# Altium PCB 控制盒AB区8按键.PcbDoc
Units mil, origin at the board's own origin, x right, y up, seen from the top; angles counter-clockwise.
Board outline 535.43 x 5142.52 mil, 2 copper layers (Top Layer, Bottom Layer); 1 components, 9 nets, 26 pads, 16 vias.
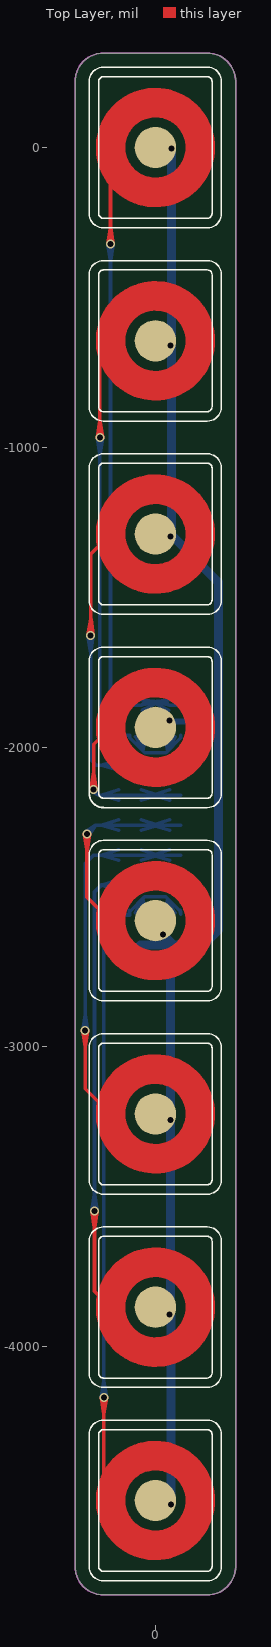
[diagram p0: Top Layer view]
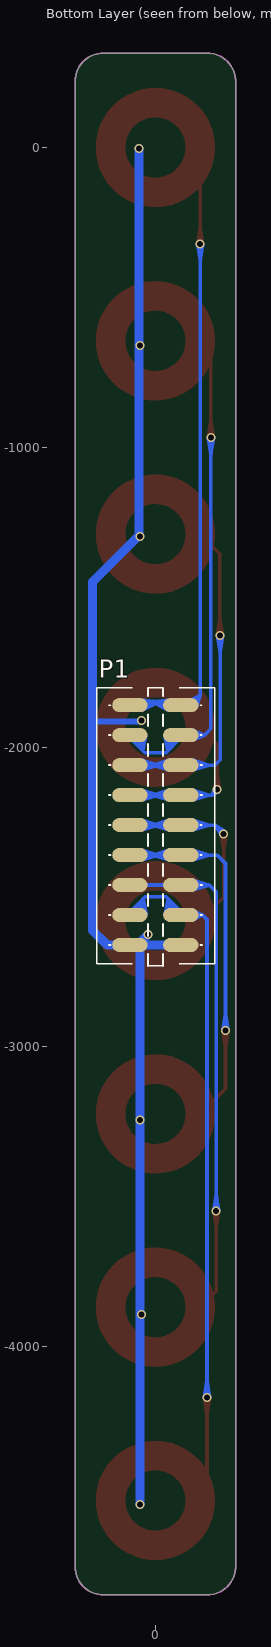
[diagram p1: Bottom Layer view, seen from below]

## Layer stack, top to bottom
Top Solder: solder mask 0.4, Solder Resist, Dk 3.5
Top Layer: signal copper 1.4
Dielectric1: dielectric 12.6, FR-4, Dk 4.8
Bottom Layer: signal copper 1.4
Bottom Solder: solder mask 0.4, Solder Resist, Dk 3.5

## Board outline
-267.72,-4733.18 ccw(c-173.23,-4733.18) -173.23,-4827.67 173.23,-4827.67 ccw(c173.23,-4733.18) 267.72,-4733.18 267.72,220.36 ccw(c173.23,220.36) 173.23,314.85 -173.23,314.85 ccw(c-173.23,220.36) -267.72,220.36

## Design rules (kind name [scope] priority, off if disabled: settings)
Clearance [All] p1: gap=10
PolygonConnect [All] p1: connectstyle=Relief reliefconductorwidth=10 reliefentries=4 polygonreliefangle="90 Angle" airgapwidth=10
RoutingVias [All] p1: holewidth=28 width=50 viastyle="Through Hole" minholewidth=10 minwidth=10 maxholewidth=28 maxwidth=50
SilkToSolderMaskClearance SilkscreenOverComponentPads [IsPad] p1: minsilkscreentomaskgap=10 clearancetoexposedcopper=TRUE
SolderMaskExpansion [All] p1: expansion=4
Width [All] p1: maxlimit=50 minlimit=10 preferedwidth=10
28 further rules are at their usual default settings.

## Components (designator, comment, footprint, x,y, rotation, side; value= is the part's Value field where it differs from the comment)
P1 "Header 9" CON-P9 0,-2260 r180 bottom

## Footprints (in the part's own frame and the unit in brackets; to place one, negate y for a bottom-side part, rotate by r counter-clockwise, add the part's x,y. Pads: shape width x height; smd on the part's side, far side on the other; paste and mask are expansions set on the pad)
CON-P9 [mm]
  oval 3x1.2 smd: 1(-2.159,10.16) 1(2.159,10.16) 2(-2.159,7.62) 2(2.159,7.62) 3(-2.159,5.08) 3(2.159,5.08) 4(-2.159,2.54) 4(2.159,2.54) 5(-2.159,0) 5(2.159,0) 6(-2.159,-2.54) 6(2.159,-2.54) 7(-2.159,-5.08) 7(2.159,-5.08) 8(-2.159,-7.62) 8(2.159,-7.62) 9(-2.159,-10.16) 9(2.159,-10.16)
  silkscreen extent -4.97,-11.94 5.03,11.64

## Part data
P1: "Header, 9-Pin"

## Free pads (board coordinates)
  round 137.8 smd: 1(0,0) 2(0,-644.68) 3(0,-1289.37) 4(0,-1934.06) 5(0,-2578.74) 6(0,-3223.43) 7(0,-3868.11) 8(0,-4512.8)

## Via types
v1: diameter 30, hole 20, Top Layer to Bottom Layer, tented both sides, 15 vias
v2: diameter 30, hole 20, Top Layer to Bottom Layer, tented bottom, 1 vias

## Nets (pads, with @x,y where several pads share a name; then routed paths per layer and width w, separated by ;. In a path a pad name is that pad's centre, name@x,y a point inside that pad or via, vN(x,y) a via of type N, cw(c..) or ccw(c..) an arc to the next point about the centre after c; other vN are vias at no path point)
K1: P1.1 | length 6062.1
  Top Layer w12: v1@-158.55,-321.88 -149.93,-269.7 ; v1@-158.55,-321.85 -149.58,-267.58 v1@-140.61,-321.85 ; v1@-158.55,-321.79 -149.58,-271.58 v1@-140.62,-321.79 ; v1@-158.54,-321.76 -149.23,-269.7 ; -149.58,-2.66 v1(-149.58,-322.58) ; v1@-140.61,-321.88 -149.23,-269.7 ; v1@-140.62,-321.76 -149.93,-269.7 ; -149.93,-269.7 v1(-149.58,-322.58) ; v1(-149.58,-322.58) -149.23,-269.7
  Top Layer w94.49: -149.58,-2.66 cw(c0,0) -149.61,0 cw(c0,0) 149.61,0
  Top Layer w98.43: -149.61,0 ccw(c0,0) -149.58,-2.66 ccw(c0,0) 149.61,0 ; 149.61,0 ccw(c0,0) 149.61,0
  Bottom Layer w12: P1.1@-50.15,-1842.39 11.58,-1849.16 ; P1.1@-49.57,-1860 11.58,-1849.16 ; P1.1@-44.06,-1876.74 11.58,-1849.16 ; P1.1@44.06,-1876.74 -11.58,-1849.16 ; P1.1@49.57,-1860 -11.58,-1849.16 ; P1.1@50.15,-1842.39 -11.58,-1849.16 ; P1.1@85,-1860 46.01,-1860 35.17,-1849.16 -35.17,-1849.16 -46.01,-1860 -85,-1860 -116,-1860 -149.58,-1826.42 ; -149.93,-375.46 -140.62,-323.41 -149.58,-373.58 -158.55,-323.38 -149.23,-375.46 ; -149.93,-375.46 -158.55,-323.29 -149.58,-377.58 -140.61,-323.32 -149.23,-375.46 ; -149.93,-375.46 v1(-149.58,-322.58) ; -149.58,-1826.42 v1(-149.58,-322.58) ; -149.58,-1826.42 P1.1@-135.77,-1868.69 ; -149.58,-1826.42 P1.1@-109.68,-1846.04 ; -149.58,-1826.42 P1.1@-120.43,-1860 ; -149.58,-1826.42 P1.1@-135.77,-1868.69 ; -149.58,-1826.42 P1.1@-109.68,-1846.04 ; -149.58,-1826.42 P1.1@-120.43,-1860 ; -149.58,-1826.42 P1.1@-135.77,-1868.69 ; -149.58,-1826.42 P1.1@-109.68,-1846.04 ; -149.58,-1826.42 P1.1@-120.43,-1860 ; -149.58,-1826.42 P1.1@-135.77,-1868.69 ; -149.58,-1826.42 P1.1@-109.68,-1846.04 ; -149.58,-1826.42 P1.1@-120.43,-1860 ; -149.58,-1826.42 P1.1@-135.77,-1868.69 ; -149.58,-1826.42 P1.1@-109.68,-1846.04 ; -149.58,-1826.42 P1.1@-120.43,-1860 ; v1(-149.58,-322.58) -149.23,-375.46
K2: P1.2 | length 5554.6
  Top Layer w12: v1@-193.97,-967.29 -185.35,-915.12 ; v1@-193.97,-967.26 -185,-913 v1@-176.03,-967.26 ; v1@-193.96,-967.21 -185,-917 v1@-176.04,-967.21 ; v1@-193.96,-967.17 -184.65,-915.12 ; v1@-176.04,-967.17 -185.35,-915.12 ; v1@-176.03,-967.29 -184.65,-915.12 ; -149.61,-644.68 -185,-680.08 v1(-185,-968) ; -185.35,-915.12 v1(-185,-968) ; v1(-185,-968) -184.65,-915.12
  Top Layer w94.49: -149.61,-644.68 ccw(c0,-644.68) 149.61,-644.68 ccw(c0,-644.68) -149.61,-644.68
  Top Layer w98.43: 149.61,-644.68 ccw(c0,-644.68) 149.61,-644.68
  Bottom Layer w12: v1@-193.96,-968.83 -184.65,-1020.88 ; v1@-193.96,-968.79 -185,-1019 v1@-176.04,-968.79 ; v1@-193.97,-968.74 -185,-1023 v1@-176.03,-968.74 ; v1@-193.97,-968.71 -185.35,-1020.88 ; v1@-176.04,-968.83 -185.35,-1020.88 ; v1@-176.03,-968.71 -184.65,-1020.88 ; P1.2@-66.34,-1965.39 -42.09,-2012.03 ; P1.2@-49.57,-1960 -42.09,-2012.03 ; P1.2@-31.95,-1960.45 -42.09,-2012.03 ; P1.2@31.95,-1960.45 42.09,-2012.03 ; P1.2@49.57,-1960 42.09,-2012.03 ; P1.2@66.34,-1965.39 42.09,-2012.03 ; P1.2@85,-1960 85,-1969.12 35.17,-2018.95 -35.17,-2018.95 -85,-1969.12 -85,-1960 -164,-1960 ; -185.35,-1020.88 v1(-185,-968) ; v1(-185,-968) -185,-1939 -164,-1960 ; v1(-185,-968) -184.65,-1020.88 ; -164,-1960 P1.2@-124,-1977.26 ; -164,-1960 P1.2@-124,-1942.74 ; -164,-1960 P1.2@-120.43,-1960 ; -164,-1960 P1.2@-124,-1977.26 ; -164,-1960 P1.2@-124,-1942.74 ; -164,-1960 P1.2@-120.43,-1960 ; -164,-1960 P1.2@-124,-1977.26 ; -164,-1960 P1.2@-124,-1942.74 ; -164,-1960 P1.2@-120.43,-1960 ; -164,-1960 P1.2@-124,-1977.26 ; -164,-1960 P1.2@-124,-1942.74 ; -164,-1960 P1.2@-120.43,-1960 ; -164,-1960 P1.2@-124,-1977.26 ; -164,-1960 P1.2@-124,-1942.74 ; -164,-1960 P1.2@-120.43,-1960
K3: P1.3 | length 8798.4
  Top Layer w12: v1@-224.96,-1626.13 -215.39,-1574.12 ; v1@-224.95,-1626.1 -215,-1571.98 ; v1@-224.95,-1626.01 -214.68,-1574.13 ; v1@-207.02,-1626.38 -215,-1575.97 ; -149.61,-1289.37 -215,-1354.76 -215,-1626 v1(-216,-1627) ; v1(-216,-1627) -215,-1571.98 ; v1(-216,-1627) -215.39,-1574.12 ; v1(-216,-1627) -214.68,-1574.13 ; v1(-216,-1627) -215,-1575.97 ; -215.39,-1574.12 -207.02,-1626.34 -215.07,-1576.01 -224.95,-1626.04 -215,-1575.97 ; -215,-1571.98 -207.02,-1626.43 -214.68,-1574.13
  Top Layer w94.49: -149.61,-1289.37 ccw(c0,-1289.37) 149.61,-1289.37 ; -149.61,-1289.37 cw(c0,-1289.37) 149.61,-1289.37 ; -149.61,-1289.37 cw(c0,-1289.37) 149.61,-1289.37 ; -149.61,-1289.37 ccw(c0,-1289.37) 149.61,-1289.37 ; -149.61,-1289.37 cw(c0,-1289.37) 149.61,-1289.37 ; -149.61,-1289.37 ccw(c0,-1289.37) 149.61,-1289.37
  Top Layer w98.43: 149.61,-1289.37 ccw(c0,-1289.37) 149.61,-1289.37
  Bottom Layer w12: v1@-224.96,-1627.83 -215.65,-1679.88 ; v1@-224.96,-1627.79 -216,-1678 v1@-207.04,-1627.79 ; v1@-224.97,-1627.74 -216,-1682 v1@-207.03,-1627.74 ; v1@-224.97,-1627.71 -216.35,-1679.88 ; v1@-207.04,-1627.83 -216.35,-1679.88 ; v1@-207.03,-1627.71 -215.65,-1679.88 ; P1.3@85,-2060 -85,-2060 -198,-2060 -216,-2042 v1(-216,-1627) ; -216.35,-1679.88 v1(-216,-1627) ; v1(-216,-1627) -215.65,-1679.88 ; -180.06,-2060 P1.3@-123.04,-2077.43 ; -180.06,-2060 P1.3@-123.04,-2042.57 ; -180.06,-2060 P1.3@-120.43,-2060 ; -180.06,-2060 P1.3@-123.04,-2077.43 ; -180.06,-2060 P1.3@-123.04,-2042.57 ; -180.06,-2060 P1.3@-120.43,-2060 ; -180.06,-2060 P1.3@-123.04,-2077.43 ; -180.06,-2060 P1.3@-123.04,-2042.57 ; -180.06,-2060 P1.3@-120.43,-2060 ; -180.06,-2060 P1.3@-123.04,-2077.43 ; -180.06,-2060 P1.3@-123.04,-2042.57 ; -180.06,-2060 P1.3@-120.43,-2060 ; -180.06,-2060 P1.3@-123.04,-2077.43 ; -180.06,-2060 P1.3@-123.04,-2042.57 ; -180.06,-2060 P1.3@-120.43,-2060 ; P1.3@-49.57,-2060 10.06,-2060 ; P1.3@-49.57,-2060 10.06,-2060 ; P1.3@-49.57,-2060 10.06,-2060 ; P1.3@-49.57,-2060 10.06,-2060 ; P1.3@-49.57,-2060 10.06,-2060 ; P1.3@-46.96,-2077.43 10.06,-2060 ; P1.3@-46.96,-2077.43 10.06,-2060 ; P1.3@-46.96,-2077.43 10.06,-2060 ; P1.3@-46.96,-2077.43 10.06,-2060 ; P1.3@-46.96,-2077.43 10.06,-2060 ; P1.3@-46.96,-2042.57 10.06,-2060 ; P1.3@-46.96,-2042.57 10.06,-2060 ; P1.3@-46.96,-2042.57 10.06,-2060 ; P1.3@-46.96,-2042.57 10.06,-2060 ; P1.3@-46.96,-2042.57 10.06,-2060 ; -10.06,-2060 P1.3@46.96,-2077.43 ; -10.06,-2060 P1.3@46.96,-2042.57 ; -10.06,-2060 P1.3@49.57,-2060 ; -10.06,-2060 P1.3@46.96,-2077.43 ; -10.06,-2060 P1.3@46.96,-2042.57 ; -10.06,-2060 P1.3@49.57,-2060 ; -10.06,-2060 P1.3@46.96,-2077.43 ; -10.06,-2060 P1.3@46.96,-2042.57 ; -10.06,-2060 P1.3@49.57,-2060 ; -10.06,-2060 P1.3@46.96,-2077.43 ; -10.06,-2060 P1.3@46.96,-2042.57 ; -10.06,-2060 P1.3@49.57,-2060 ; -10.06,-2060 P1.3@46.96,-2077.43 ; -10.06,-2060 P1.3@46.96,-2042.57 ; -10.06,-2060 P1.3@49.57,-2060
K4: P1.4 | length 6613
  Top Layer w12: v1@-214.97,-2141.29 -206.35,-2089.12 ; v1@-214.97,-2141.26 -206,-2087 v1@-197.03,-2141.26 ; v1@-214.96,-2141.21 -206,-2091 v1@-197.04,-2141.21 ; v1@-214.96,-2141.17 -205.65,-2089.12 ; v1@-197.04,-2141.17 -206.35,-2089.12 ; v1@-197.03,-2141.29 -205.65,-2089.12 ; -149.61,-1934.06 -206,-1990.45 v1(-206,-2142) ; -206.35,-2089.12 v1(-206,-2142) ; v1(-206,-2142) -205.65,-2089.12
  Top Layer w94.49: -149.61,-1934.06 ccw(c0,-1934.06) 149.61,-1934.06 ; -149.61,-1934.06 cw(c0,-1934.06) 149.61,-1934.06 ; -149.61,-1934.06 ccw(c0,-1934.06) 149.61,-1934.06 ; -149.61,-1934.06 cw(c0,-1934.06) 149.61,-1934.06
  Top Layer w98.43: 149.61,-1934.06 ccw(c0,-1934.06) 149.61,-1934.06
  Bottom Layer w12: v1@-211.14,-2149.39 -188,-2160 ; v1(-206,-2142) -188,-2160 ; v1@-198.61,-2136.86 -188,-2160 ; P1.4@85,-2160 -85,-2160 -188,-2160 ; -180.06,-2160 P1.4@-123.04,-2177.43 ; -180.06,-2160 P1.4@-123.04,-2142.57 ; -180.06,-2160 P1.4@-120.43,-2160 ; -180.06,-2160 P1.4@-123.04,-2177.43 ; -180.06,-2160 P1.4@-123.04,-2142.57 ; -180.06,-2160 P1.4@-120.43,-2160 ; -180.06,-2160 P1.4@-123.04,-2177.43 ; -180.06,-2160 P1.4@-123.04,-2142.57 ; -180.06,-2160 P1.4@-120.43,-2160 ; -180.06,-2160 P1.4@-123.04,-2177.43 ; -180.06,-2160 P1.4@-123.04,-2142.57 ; -180.06,-2160 P1.4@-120.43,-2160 ; -180.06,-2160 P1.4@-123.04,-2177.43 ; -180.06,-2160 P1.4@-123.04,-2142.57 ; -180.06,-2160 P1.4@-120.43,-2160 ; P1.4@-49.57,-2160 10.06,-2160 ; P1.4@-49.57,-2160 10.06,-2160 ; P1.4@-49.57,-2160 10.06,-2160 ; P1.4@-49.57,-2160 10.06,-2160 ; P1.4@-49.57,-2160 10.06,-2160 ; P1.4@-46.96,-2177.43 10.06,-2160 ; P1.4@-46.96,-2177.43 10.06,-2160 ; P1.4@-46.96,-2177.43 10.06,-2160 ; P1.4@-46.96,-2177.43 10.06,-2160 ; P1.4@-46.96,-2177.43 10.06,-2160 ; P1.4@-46.96,-2142.57 10.06,-2160 ; P1.4@-46.96,-2142.57 10.06,-2160 ; P1.4@-46.96,-2142.57 10.06,-2160 ; P1.4@-46.96,-2142.57 10.06,-2160 ; P1.4@-46.96,-2142.57 10.06,-2160 ; -10.06,-2160 P1.4@46.96,-2177.43 ; -10.06,-2160 P1.4@46.96,-2142.57 ; -10.06,-2160 P1.4@49.57,-2160 ; -10.06,-2160 P1.4@46.96,-2177.43 ; -10.06,-2160 P1.4@46.96,-2142.57 ; -10.06,-2160 P1.4@49.57,-2160 ; -10.06,-2160 P1.4@46.96,-2177.43 ; -10.06,-2160 P1.4@46.96,-2142.57 ; -10.06,-2160 P1.4@49.57,-2160 ; -10.06,-2160 P1.4@46.96,-2177.43 ; -10.06,-2160 P1.4@46.96,-2142.57 ; -10.06,-2160 P1.4@49.57,-2160 ; -10.06,-2160 P1.4@46.96,-2177.43 ; -10.06,-2160 P1.4@46.96,-2142.57 ; -10.06,-2160 P1.4@49.57,-2160
K5: P1.5 | length 7591.1
  Top Layer w12: v1@-236.96,-2289.83 -227.65,-2341.88 ; v1@-236.96,-2289.79 -228,-2340 v1@-219.04,-2289.79 ; v1@-236.97,-2289.74 -228,-2344 v1@-219.03,-2289.74 ; v1@-236.97,-2289.71 -228.35,-2341.88 ; v1@-219.04,-2289.83 -228.35,-2341.88 ; v1@-219.03,-2289.71 -227.65,-2341.88 ; -149.61,-2578.74 -228,-2500.35 v1(-228,-2289) ; 149.61,-2578.74 149.61,-2609.61 150,-2610 ; -228.35,-2341.88 v1(-228,-2289) ; v1(-228,-2289) -227.65,-2341.88
  Top Layer w94.49: -149.61,-2578.74 cw(c0,-2578.74) 149.61,-2578.74 ; -149.61,-2578.74 cw(c0,-2578.74) 149.61,-2578.74 ; -149.61,-2578.74 cw(c0,-2578.74) 149.61,-2578.74
  Top Layer w98.43: 149.61,-2578.74 cw(c0,-2578.74) -149.61,-2578.74 ccw(c0,-2578.74) 149.61,-2578.74 ; 149.61,-2578.74 ccw(c0,-2578.74) 149.61,-2578.74
  Bottom Layer w12: P1.5@85,-2260 -85,-2260 -199,-2260 ; v1@-233.63,-2281.98 -199,-2260 ; v1@-233.63,-2281.98 -199,-2260 ; v1@-233.63,-2281.98 -199,-2260 ; v1@-233.63,-2281.98 -199,-2260 ; v1(-228,-2289) -199,-2260 ; v1(-228,-2289) -199,-2260 ; v1(-228,-2289) -199,-2260 ; v1@-220.98,-2294.63 -199,-2260 ; v1@-220.98,-2294.63 -199,-2260 ; v1@-220.98,-2294.63 -199,-2260 ; v1@-220.98,-2294.63 -199,-2260 ; -180.06,-2260 P1.5@-123.04,-2277.43 ; -180.06,-2260 P1.5@-123.04,-2242.57 ; -180.06,-2260 P1.5@-120.43,-2260 ; -180.06,-2260 P1.5@-123.04,-2277.43 ; -180.06,-2260 P1.5@-123.04,-2242.57 ; -180.06,-2260 P1.5@-120.43,-2260 ; -180.06,-2260 P1.5@-123.04,-2277.43 ; -180.06,-2260 P1.5@-123.04,-2242.57 ; -180.06,-2260 P1.5@-120.43,-2260 ; -180.06,-2260 P1.5@-123.04,-2277.43 ; -180.06,-2260 P1.5@-123.04,-2242.57 ; -180.06,-2260 P1.5@-120.43,-2260 ; -180.06,-2260 P1.5@-123.04,-2277.43 ; -180.06,-2260 P1.5@-123.04,-2242.57 ; -180.06,-2260 P1.5@-120.43,-2260 ; P1.5@-49.57,-2260 10.06,-2260 ; P1.5@-49.57,-2260 10.06,-2260 ; P1.5@-49.57,-2260 10.06,-2260 ; P1.5@-49.57,-2260 10.06,-2260 ; P1.5@-49.57,-2260 10.06,-2260 ; P1.5@-46.96,-2277.43 10.06,-2260 ; P1.5@-46.96,-2277.43 10.06,-2260 ; P1.5@-46.96,-2277.43 10.06,-2260 ; P1.5@-46.96,-2277.43 10.06,-2260 ; P1.5@-46.96,-2277.43 10.06,-2260 ; P1.5@-46.96,-2242.57 10.06,-2260 ; P1.5@-46.96,-2242.57 10.06,-2260 ; P1.5@-46.96,-2242.57 10.06,-2260 ; P1.5@-46.96,-2242.57 10.06,-2260 ; P1.5@-46.96,-2242.57 10.06,-2260 ; -10.06,-2260 P1.5@46.96,-2277.43 ; -10.06,-2260 P1.5@46.96,-2242.57 ; -10.06,-2260 P1.5@49.57,-2260 ; -10.06,-2260 P1.5@46.96,-2277.43 ; -10.06,-2260 P1.5@46.96,-2242.57 ; -10.06,-2260 P1.5@49.57,-2260 ; -10.06,-2260 P1.5@46.96,-2277.43 ; -10.06,-2260 P1.5@46.96,-2242.57 ; -10.06,-2260 P1.5@49.57,-2260 ; -10.06,-2260 P1.5@46.96,-2277.43 ; -10.06,-2260 P1.5@46.96,-2242.57 ; -10.06,-2260 P1.5@49.57,-2260 ; -10.06,-2260 P1.5@46.96,-2277.43 ; -10.06,-2260 P1.5@46.96,-2242.57 ; -10.06,-2260 P1.5@49.57,-2260
K6: P1.6 | length 9642.5
  Top Layer w12: v1@-242.96,-2946.83 -233.65,-2998.88 ; v1@-242.96,-2946.79 -234,-2997 v1@-225.04,-2946.79 ; v1@-242.97,-2946.74 -234,-3001 v1@-225.03,-2946.74 ; v1@-242.97,-2946.71 -234.35,-2998.88 ; v1@-225.04,-2946.83 -234.35,-2998.88 ; v1@-225.03,-2946.71 -233.65,-2998.88 ; -149.61,-3223.43 -234,-3139.03 v1(-234,-2946) ; -234.35,-2998.88 v1(-234,-2946) ; v1(-234,-2946) -233.65,-2998.88
  Top Layer w94.49: -149.61,-3223.43 ccw(c0,-3223.43) 149.61,-3223.43 ; -149.61,-3223.43 cw(c0,-3223.43) 149.61,-3223.43 ; -149.61,-3223.43 cw(c0,-3223.43) 149.61,-3223.43 ; -149.61,-3223.43 cw(c0,-3223.43) 149.61,-3223.43 ; -149.61,-3223.43 ccw(c0,-3223.43) 149.61,-3223.43 ; -149.61,-3223.43 ccw(c0,-3223.43) 149.61,-3223.43 ; -149.61,-3223.43 ccw(c0,-3223.43) 149.61,-3223.43 ; -149.61,-3223.43 cw(c0,-3223.43) 149.61,-3223.43
  Top Layer w98.43: 149.61,-3223.43 ccw(c0,-3223.43) 149.61,-3223.43
  Bottom Layer w12: v1@-242.97,-2945.29 -234.35,-2893.12 ; v1@-242.97,-2945.26 -234,-2891 v1@-225.03,-2945.26 ; v1@-242.96,-2945.21 -234,-2895 v1@-225.04,-2945.21 ; v1@-242.96,-2945.17 -233.65,-2893.12 ; v1@-225.04,-2945.17 -234.35,-2893.12 ; v1@-225.03,-2945.29 -233.65,-2893.12 ; P1.6@85,-2360 -85,-2360 -206,-2360 -234,-2388 v1(-234,-2946) ; -234.35,-2893.12 v1(-234,-2946) ; v1(-234,-2946) -233.65,-2893.12 ; -180.06,-2360 P1.6@-123.04,-2377.43 ; -180.06,-2360 P1.6@-123.04,-2342.57 ; -180.06,-2360 P1.6@-120.43,-2360 ; -180.06,-2360 P1.6@-123.04,-2377.43 ; -180.06,-2360 P1.6@-123.04,-2342.57 ; -180.06,-2360 P1.6@-120.43,-2360 ; -180.06,-2360 P1.6@-123.04,-2377.43 ; -180.06,-2360 P1.6@-123.04,-2342.57 ; -180.06,-2360 P1.6@-120.43,-2360 ; -180.06,-2360 P1.6@-123.04,-2377.43 ; -180.06,-2360 P1.6@-123.04,-2342.57 ; -180.06,-2360 P1.6@-120.43,-2360 ; -180.06,-2360 P1.6@-123.04,-2377.43 ; -180.06,-2360 P1.6@-123.04,-2342.57 ; -180.06,-2360 P1.6@-120.43,-2360 ; P1.6@-49.57,-2360 10.06,-2360 ; P1.6@-49.57,-2360 10.06,-2360 ; P1.6@-49.57,-2360 10.06,-2360 ; P1.6@-49.57,-2360 10.06,-2360 ; P1.6@-49.57,-2360 10.06,-2360 ; P1.6@-46.96,-2377.43 10.06,-2360 ; P1.6@-46.96,-2377.43 10.06,-2360 ; P1.6@-46.96,-2377.43 10.06,-2360 ; P1.6@-46.96,-2377.43 10.06,-2360 ; P1.6@-46.96,-2377.43 10.06,-2360 ; P1.6@-46.96,-2342.57 10.06,-2360 ; P1.6@-46.96,-2342.57 10.06,-2360 ; P1.6@-46.96,-2342.57 10.06,-2360 ; P1.6@-46.96,-2342.57 10.06,-2360 ; P1.6@-46.96,-2342.57 10.06,-2360 ; -10.06,-2360 P1.6@46.96,-2377.43 ; -10.06,-2360 P1.6@46.96,-2342.57 ; -10.06,-2360 P1.6@49.57,-2360 ; -10.06,-2360 P1.6@46.96,-2377.43 ; -10.06,-2360 P1.6@46.96,-2342.57 ; -10.06,-2360 P1.6@49.57,-2360 ; -10.06,-2360 P1.6@46.96,-2377.43 ; -10.06,-2360 P1.6@46.96,-2342.57 ; -10.06,-2360 P1.6@49.57,-2360 ; -10.06,-2360 P1.6@46.96,-2377.43 ; -10.06,-2360 P1.6@46.96,-2342.57 ; -10.06,-2360 P1.6@49.57,-2360 ; -10.06,-2360 P1.6@46.96,-2377.43 ; -10.06,-2360 P1.6@46.96,-2342.57 ; -10.06,-2360 P1.6@49.57,-2360
K7: P1.7 | length 5548.1
  Top Layer w12: v1@-211.96,-3547.83 -202.65,-3599.88 ; v1@-211.96,-3547.79 -203,-3598 v1@-194.04,-3547.79 ; v1@-211.97,-3547.74 -203,-3602 v1@-194.03,-3547.74 ; v1@-211.97,-3547.71 -203.35,-3599.88 ; v1@-201,-3545 v1(-203,-3547) ; v1@-197,-3553 v1(-203,-3547) ; v1@-194.04,-3547.83 -203.35,-3599.88 ; v1@-194.03,-3547.71 -202.65,-3599.88 ; -149.61,-3868.11 -203,-3814.72 v1(-203,-3547) ; -203.35,-3599.88 v1(-203,-3547) ; v1(-203,-3547) -202.65,-3599.88
  Top Layer w94.49: -149.61,-3868.11 cw(c0,-3868.11) 149.61,-3868.11 cw(c0,-3868.11) -149.61,-3868.11
  Top Layer w98.43: 149.61,-3868.11 ccw(c0,-3868.11) 149.61,-3868.11
  Bottom Layer w12: v1@-211.97,-3546.29 -203.35,-3494.12 ; v1@-211.97,-3546.26 -203,-3492 v1@-194.03,-3546.26 ; v1@-211.96,-3546.21 -203,-3496 v1@-194.04,-3546.21 ; v1@-211.96,-3546.17 -202.65,-3494.12 ; v1@-194.04,-3546.17 -203.35,-3494.12 ; v1@-194.03,-3546.29 -202.65,-3494.12 ; P1.7@85,-2460 -85,-2460 -180,-2460 ; -203.35,-3494.12 v1(-203,-3547) ; v1(-203,-3547) -203,-2483 -180,-2460 ; v1(-203,-3547) -202.65,-3494.12 ; -180,-2460 P1.7@-123.04,-2477.43 ; -180,-2460 P1.7@-123.04,-2442.57 ; -180,-2460 P1.7@-120.43,-2460 ; -180,-2460 P1.7@-123.04,-2477.43 ; -180,-2460 P1.7@-123.04,-2442.57 ; -180,-2460 P1.7@-120.43,-2460 ; -180,-2460 P1.7@-123.04,-2477.43 ; -180,-2460 P1.7@-123.04,-2442.57 ; -180,-2460 P1.7@-120.43,-2460 ; -180,-2460 P1.7@-123.04,-2477.43 ; -180,-2460 P1.7@-123.04,-2442.57 ; -180,-2460 P1.7@-120.43,-2460 ; -180,-2460 P1.7@-123.04,-2477.43 ; -180,-2460 P1.7@-123.04,-2442.57 ; -180,-2460 P1.7@-120.43,-2460
K8: P1.8 | length 6090.5
  Top Layer w12: v1@-180.96,-4170.04 -171.65,-4222.09 ; v1@-180.96,-4170.01 -172,-4220.21 v1@-163.04,-4170.01 ; v1@-180.97,-4169.95 -172,-4224.21 v1@-163.03,-4169.95 ; v1@-180.97,-4169.92 -172.35,-4222.09 ; v1@-163.04,-4170.04 -172.35,-4222.09 ; v1@-163.03,-4169.92 -171.65,-4222.09 ; -149.61,-4512.8 -172,-4490.4 v1(-172,-4169.21) ; -172.35,-4222.09 v1(-172,-4169.21) ; v1(-172,-4169.21) -171.65,-4222.09
  Top Layer w94.49: -149.61,-4512.8 cw(c0,-4512.8) 149.61,-4512.8 cw(c0,-4512.8) -149.61,-4512.8
  Top Layer w98.43: 149.61,-4512.8 ccw(c0,-4512.8) 149.61,-4512.8
  Bottom Layer w12: P1.8@-87,-2552.95 P1.8@-87,-2543.83 ; P1.8@-85.89,-2557.91 -85.89,-2548.79 -36.05,-2498.96 34.28,-2498.96 84.11,-2548.79 P1.8@84.11,-2557.91 ; P1.8@-85,-2560 -157,-2560 ; P1.8@-67.23,-2552.51 -42.98,-2505.88 ; P1.8@-50.45,-2557.91 -42.98,-2505.88 ; P1.8@-32.84,-2557.46 -42.98,-2505.88 ; P1.8@31.07,-2557.46 41.21,-2505.88 ; P1.8@48.68,-2557.91 41.21,-2505.88 ; P1.8@65.46,-2552.51 41.21,-2505.88 ; P1.8@83,-2552.95 P1.8@83,-2543.83 ; -172.35,-4116.33 -180.97,-4168.51 -172,-4114.21 -163.03,-4168.48 -171.65,-4116.33 ; -172.35,-4116.33 -163.04,-4168.39 -172,-4118.21 -180.96,-4168.42 -171.65,-4116.33 ; -172.35,-4116.33 v1(-172,-4169.21) ; v1(-172,-4169.21) -172,-2575 -157,-2560 ; v1(-172,-4169.21) -171.65,-4116.33 ; -157,-2560 P1.8@-124.68,-2577.1 ; -157,-2560 P1.8@-124.68,-2542.9 ; -157,-2560 P1.8@-120.43,-2560 ; -157,-2560 P1.8@-124.68,-2577.1 ; -157,-2560 P1.8@-124.68,-2542.9 ; -157,-2560 P1.8@-120.43,-2560 ; -157,-2560 P1.8@-124.68,-2577.1 ; -157,-2560 P1.8@-124.68,-2542.9 ; -157,-2560 P1.8@-120.43,-2560 ; -157,-2560 P1.8@-124.68,-2577.1 ; -157,-2560 P1.8@-124.68,-2542.9 ; -157,-2560 P1.8@-120.43,-2560 ; -157,-2560 P1.8@-124.68,-2577.1 ; -157,-2560 P1.8@-124.68,-2542.9 ; -157,-2560 P1.8@-120.43,-2560
SGND: P1.9 pad.1 pad.2 pad.3 pad.4 pad.5 pad.6 pad.7 pad.8 | length 5158.7
  Bottom Layer w20: v2(47,-1911) v2@44,-1914 ; 210,-1914 v2@44,-1914 ; v2@44,-1914 42.88,-1915.12 42.53,-1915.12 42.45,-1915.04 43.49,-1914 v2@44,-1914
  Bottom Layer w30: v1(25,-2625) P1.9@51,-2651 ; P1.9@49.57,-2660 0,-2660 ; v1(52,-4527) 52,-3898 v1(47,-3893) 51,-3889 v1(51,-3243) P1.9@51,-2660 ; v1(54,-3) 54,-1294 210,-1450 210,-1499.37 210,-1515 210,-1914 210,-2610 160,-2660 ; P1.9@85,-2660 P1.9@60,-2660 ; 0,-2660 -49.57,-2660 0,-2660 ; 0,-2660 P1.9@51,-2660 ; P1.9@51,-2660 P1.9@60,-2660 ; P1.9@51,-2660 P1.9@51,-2651 ; P1.9@51,-2651 P1.9@60,-2660 ; 160,-2660 120.43,-2660 160,-2660
  other v1: 51,-1297 51,-660
copper on no net: | length 12.2
  Top Layer w12: 141,-2564.61 149.61,-2556

## Keep-outs
Keep-Out Layer:
  the board outline again, w5

## Silkscreen, mask and mechanical layers (free items; w line width, h text height)
Top Overlay:
  lines w5: -220.47,-2154.54 -220.47,-1713.6 cw(c-173.23,-1713.6) -173.23,-1666.35 173.23,-1666.35 cw(c173.23,-1713.6) 220.47,-1713.6 220.47,-2154.54 cw(c173.23,-2154.54) 173.23,-2201.78 -82.68,-2201.78 -173.23,-2201.78 cw(c-173.23,-2154.54) -208.66,-2185.79 ; -188.98,-2154.54 -188.98,-1730.19 -188.98,-1713.6 cw(c-173.23,-1713.6) -173.23,-1697.85 173.23,-1697.85 cw(c173.23,-1713.6) 188.98,-1713.6 188.98,-2154.54 cw(c173.23,-2154.54) 173.23,-2170.29 -82.68,-2170.29 -173.23,-2170.29 ; -220.47,-4733.28 ccw(c-173.23,-4733.28) -173.23,-4780.53 173.23,-4780.53 ccw(c173.23,-4733.28) 220.47,-4733.28 220.47,-4292.34 ccw(c173.23,-4292.34) 173.23,-4245.09 -173.23,-4245.09 ccw(c-173.23,-4292.34) -220.47,-4292.34 -220.47,-4733.28 ; -220.47,-4088.6 ccw(c-173.23,-4088.6) -173.23,-4135.84 173.23,-4135.84 ccw(c173.23,-4088.6) 220.47,-4088.6 220.47,-3647.65 ccw(c173.23,-3647.65) 173.23,-3600.41 -173.23,-3600.41 ccw(c-173.23,-3647.65) -220.47,-3647.65 -220.47,-4088.6 ; -220.47,-3443.91 ccw(c-173.23,-3443.91) -173.23,-3491.16 173.23,-3491.16 ccw(c173.23,-3443.91) 220.47,-3443.91 220.47,-3002.97 ccw(c173.23,-3002.97) 173.23,-2955.72 -173.23,-2955.72 ccw(c-173.23,-3002.97) -220.47,-3002.97 -220.47,-3443.91 ; -220.47,-2799.23 ccw(c-173.23,-2799.23) -173.23,-2846.47 173.23,-2846.47 ccw(c173.23,-2799.23) 220.47,-2799.23 220.47,-2358.28 ccw(c173.23,-2358.28) 173.23,-2311.04 -82.68,-2311.04 -173.23,-2311.04 ccw(c-173.23,-2358.28) -208.66,-2327.03 ccw(c-173.23,-2358.28) -220.47,-2358.28 -220.47,-2799.23 ; -220.47,-1509.85 ccw(c-173.23,-1509.85) -173.23,-1557.1 173.23,-1557.1 ccw(c173.23,-1509.85) 220.47,-1509.85 220.47,-1068.91 ccw(c173.23,-1068.91) 173.23,-1021.67 -173.23,-1021.67 ccw(c-173.23,-1068.91) -220.47,-1068.91 -220.47,-1509.85 ; -220.47,-865.17 ccw(c-173.23,-865.17) -173.23,-912.41 173.23,-912.41 ccw(c173.23,-865.17) 220.47,-865.17 220.47,-424.22 ccw(c173.23,-424.22) 173.23,-376.98 -173.23,-376.98 ccw(c-173.23,-424.22) -220.47,-424.22 -220.47,-865.17 ; -220.47,-220.48 ccw(c-173.23,-220.48) -173.23,-267.73 173.23,-267.73 ccw(c173.23,-220.48) 220.47,-220.48 220.47,220.46 ccw(c173.23,220.46) 173.23,267.7 -173.23,267.7 ccw(c-173.23,220.46) -220.47,220.46 -220.47,-220.48 ; -188.98,-4733.28 ccw(c-173.23,-4733.28) -173.23,-4749.03 173.23,-4749.03 ccw(c173.23,-4733.28) 188.98,-4733.28 188.98,-4292.34 ccw(c173.23,-4292.34) 173.23,-4276.59 -173.23,-4276.59 ccw(c-173.23,-4292.34) -188.98,-4292.34 -188.98,-4733.28 ; -188.98,-4088.6 ccw(c-173.23,-4088.6) -173.23,-4104.34 173.23,-4104.34 ccw(c173.23,-4088.6) 188.98,-4088.6 188.98,-3647.65 ccw(c173.23,-3647.65) 173.23,-3631.9 -173.23,-3631.9 ccw(c-173.23,-3647.65) -188.98,-3647.65 -188.98,-4088.6 ; -188.98,-3443.91 ccw(c-173.23,-3443.91) -173.23,-3459.66 173.23,-3459.66 ccw(c173.23,-3443.91) 188.98,-3443.91 188.98,-3002.97 ccw(c173.23,-3002.97) 173.23,-2987.22 -173.23,-2987.22 ccw(c-173.23,-3002.97) -188.98,-3002.97 -188.98,-3443.91 ; -188.98,-2799.23 ccw(c-173.23,-2799.23) -173.23,-2814.97 173.23,-2814.97 ccw(c173.23,-2799.23) 188.98,-2799.23 188.98,-2358.28 ccw(c173.23,-2358.28) 173.23,-2342.53 -82.68,-2342.53 -173.23,-2342.53 ccw(c-173.23,-2358.28) -188.98,-2358.28 -188.98,-2782.63 -188.98,-2799.23 ; -188.98,-1509.85 ccw(c-173.23,-1509.85) -173.23,-1525.6 173.23,-1525.6 ccw(c173.23,-1509.85) 188.98,-1509.85 188.98,-1068.91 ccw(c173.23,-1068.91) 173.23,-1053.16 -173.23,-1053.16 ccw(c-173.23,-1068.91) -188.98,-1068.91 -188.98,-1509.85 ; -188.98,-865.17 ccw(c-173.23,-865.17) -173.23,-880.92 173.23,-880.92 ccw(c173.23,-865.17) 188.98,-865.17 188.98,-424.22 ccw(c173.23,-424.22) 173.23,-408.48 -173.23,-408.48 ccw(c-173.23,-424.22) -188.98,-424.22 -188.98,-865.17 ; -188.98,-220.48 ccw(c-173.23,-220.48) -173.23,-236.23 173.23,-236.23 ccw(c173.23,-220.48) 188.98,-220.48 188.98,220.46 ccw(c173.23,220.46) 173.23,236.21 -173.23,236.21 ccw(c-173.23,220.46) -188.98,220.46 -188.98,-220.48
  lines w5.91: -220.47,-2154.54 ccw(c-173.23,-2154.54) -173.23,-2201.78 ; -188.98,-2154.54 ccw(c-173.23,-2154.54) -173.23,-2170.29
Top Solder:
  circle w94.49: c0,-4512.8 r149.61
  circle w94.49: c0,-3868.11 r149.61
  circle w94.49: c0,-3223.43 r149.61
  circle w94.49: c0,-2578.74 r149.61
  circle w94.49: c0,-1934.06 r149.61
  circle w94.49: c0,-1289.37 r149.61
  circle w94.49: c0,-644.68 r149.61
  circle w94.49: c0,0 r149.61